# Altium PCB X-DO10 RFID_V1.0..PcbDoc (part 2 of 3)
Units mm, origin at the board's own origin, x right, y up, seen from the top; angles counter-clockwise.
Board outline 1582.55 x 1344.17 mm, 2 copper layers (Top Layer, Bottom Layer); 182 components, 148 nets, 511 pads, 172 vias.
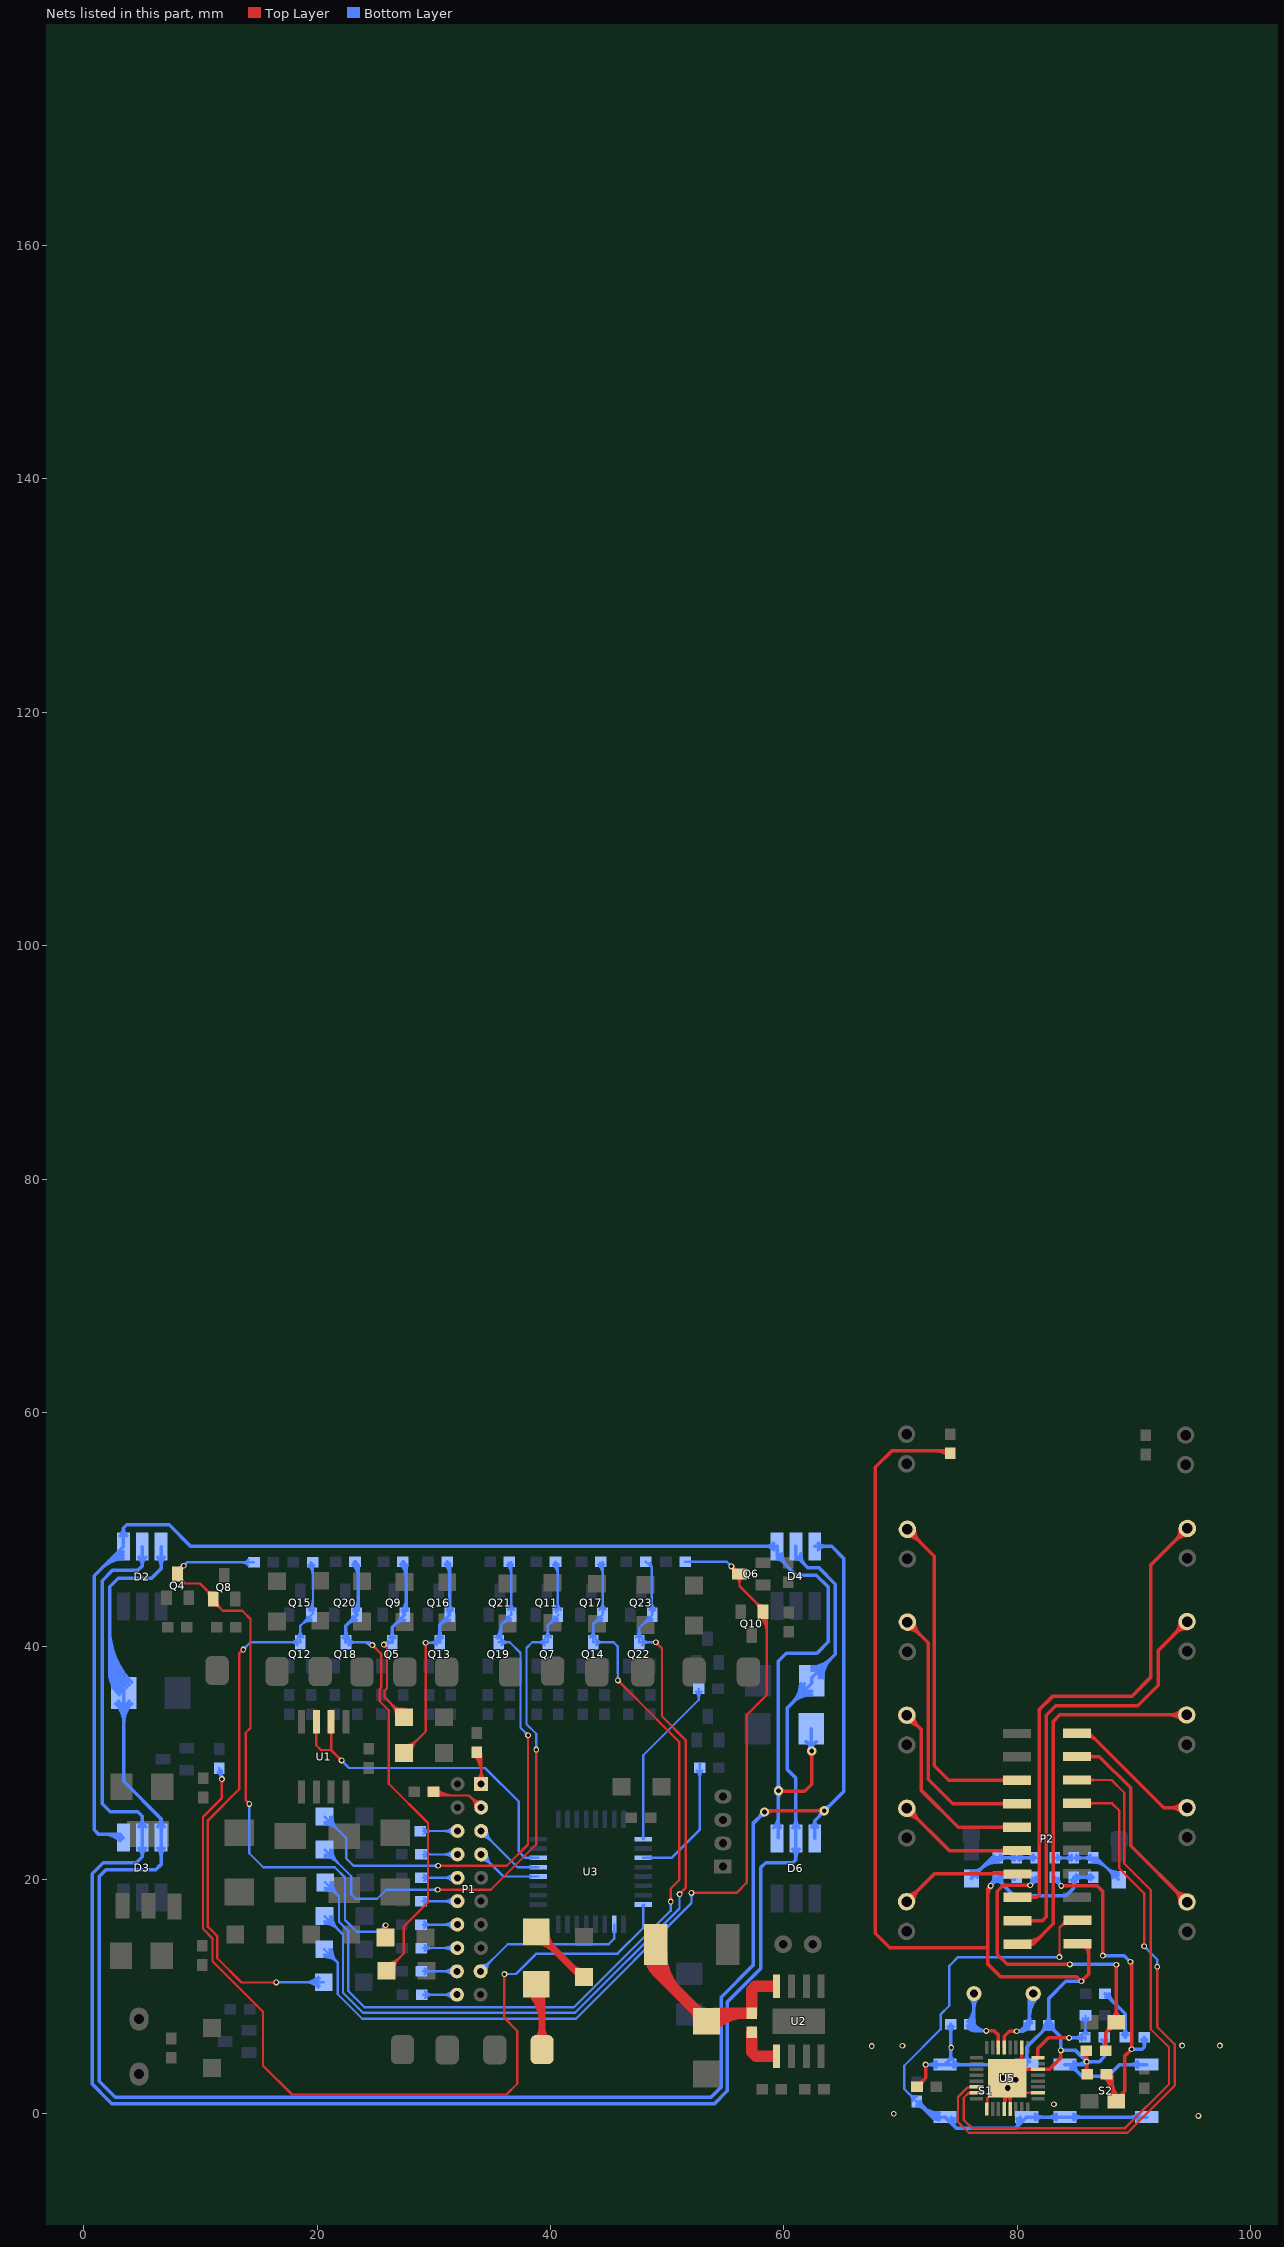
[diagram p2: the nets of this part, all layers, seen from the top]

## Via types
v1: diameter 0.5, hole 0.3, Top Layer to Bottom Layer, 158 vias
v2: diameter 0.8, hole 0.4, Top Layer to Bottom Layer, 14 vias

## Nets (pads, with @x,y where several pads share a name; then routed paths per layer and width w, separated by ;. In a path a pad name is that pad's centre, name@x,y a point inside that pad or via, vN(x,y) a via of type N, cw(c..) or ccw(c..) an arc to the next point about the centre after c; other vN are vias at no path point) (continued)
GND_R: C10.2 C11.2 C12.2 C13.2 C14.1 C15.1 C19.2 C20.1 C21.2 C22.1 P2.20 pad.0 R55.1 S1.1 S1.3 S2.1 S2.3 U5.1 U5.4 U5.5 U5.10 U5.14 U5.18 U5.33 | length 208
  Top Layer w0.2: U5.1@77.34,0.81 ccw(c77.194,0.956) 77.4,0.956 ; U5.1@77.375,0.375 77.4,0.4 77.4,1.275 ; U5.33@77.667,2.473 cw(c76.591,2.084) 77.4,1.275 ; U5.33@77.699,1.574 ccw(c76.248,3.025) U5.33@78.3,3.025 ; U5.33@77.855,2.541 cw(c76.918,2.203) 77.623,1.498 cw(c78.328,0.793) U5.33@78.666,1.73 ; U5.33@78.04,1.915 ccw(c76.931,3.025) U5.33@78.5,3.025 ; U5.33@78.043,2.609 cw(c77.245,2.321) 77.845,1.72 cw(c78.446,1.12) U5.33@78.734,1.918 ; U5.33@78.382,2.257 ccw(c77.614,3.025) pad.0@78.7,3.025 ; U5.33@78.417,2.742 cw(c77.312,1.637) U5.33@78.875,1.637 ; U5.33@78.559,2.884 cw(c77.795,2.12) U5.33@78.875,2.12 ; U5.33@78.598,1.542 ccw(c78.209,0.466) 77.4,1.275 ; U5.4@78.875,0.375 U5.33@78.875,2.75 ; U5.4@78.875,0.485 cw(c80.865,0.485) 79.458,1.892 ccw(c79.658,1.692) 79.375,1.692 ccw(c78.692,1.692) pad.0@79.175,2.175 ccw(c79.899,1.451) U5.33@78.875,1.451 ; U5.4@78.875,0.968 cw(c80.382,0.968) U5.33@79.316,2.034 ; U5.33@78.875,2.482 cw(c79.243,2.482) U5.33@78.983,2.742 ; U5.33@78.892,1.892 cw(c77.726,0.726) U5.5@79.375,0.726 ; U5.33@79.034,2.034 cw(c78.209,1.209) 79.375,1.209 ; U5.5@79.375,0.375 79.375,2.75 U5.33@79.125,3 U5.33@78.875,2.75 ; U5.5@79.375,0.763 cw(c81.962,0.763) U5.33@80.133,2.592 ; 79.375,1.245 cw(c81.48,1.245) U5.33@79.991,2.734 ; U5.33@79.375,1.728 cw(c80.997,1.728) pad.0@79.85,2.875 ; U5.33@79.375,2.211 cw(c80.514,2.211) U5.33@79.709,3.016 ; U5.33@79.375,2.658 ccw(c79.658,2.658) U5.33@79.458,2.458 ; U5.33@79.375,2.694 cw(c80.031,2.694) U5.33@79.567,3.158 ; U5.33@80.375,1.75 U5.10@81.75,1.75 ; 77.4,1.275 U5.33@78.875,2.75
  Top Layer w0.3: C12.2@71.4,2.275 72.15,3.025 v1@72.15,4.225 ; C12.2@71.45,2.575 ccw(c71.45,3.179) 71.877,2.752 ; C12.2@71.75,2.275 cw(c72.595,2.275) 71.997,2.872 ; v1@72.054,4.104 cw(c71.823,3.873) 72.15,3.873 ; 73.127,56.73 cw(c73.127,55.477) R55.1@74.013,56.363 ; R55.1@74.225,56.525 74.02,56.73 69.23,56.73 67.825,55.325 67.825,15.425 69.075,14.175 77.475,14.175 77.475,12.775 78.55,11.7 85.075,11.7 v1(85.475,11.3) 86.1,11.925 P2.20@86.1,14.602 ; 77.475,14.25 77.475,19.25 v1(77.7,19.475) ; 77.475,18.69 cw(c78.485,18.69) v1@77.771,19.404 ; U5.33@79.875,3.75 U5.14@81.75,3.75 82.725,3.75 83.725,4.75 v1(83.725,5.375) ; U5.33@80.375,4.25 U5.18@80.375,5.625 ; C15.1@85.688,5.138 cw(c85.115,4.565) v1@85.925,4.565 ; C14.1@85.713,3.537 ccw(c85.201,4.049) 85.925,4.049 ccw(c86.649,4.049) C14.1@86.137,3.537 ; P2.20@85.761,14.338 cw(c84.942,13.519) 86.1,13.519 ; v1@85.838,4.475 ccw(c85.522,4.658) 85.875,4.752 ; C15.1@85.9,5.35 85.925,5.325 v1(85.925,4.425) C14.1@85.925,3.375 ; 85.925,4.686 cw(c86.564,4.686) C15.1@86.112,5.138
  Bottom Layer w0.3: v1(72.125,4.175) S1.1@73.72,4.175 ; S1.1@73.048,3.928 ccw(c72.45,3.33) 72.45,4.175 ccw(c72.45,5.02) S1.1@73.048,4.422 ; S1.1@74.048,4.422 ccw(c73.498,4.972) 74.275,4.972 ; C11.2@74.063,7.413 cw(c73.551,6.901) 74.275,6.901 cw(c74.999,6.901) C11.2@74.487,7.413 ; 74.275,5.068 ccw(c75.188,5.068) 74.542,4.422 ccw(c75.14,5.02) 75.14,4.175 ccw(c75.14,3.33) S1.1@74.542,3.928 ; C11.2@74.275,7.625 74.275,4.655 S1.1@73.795,4.175 S1.3@80.795,4.175 80.795,5.67 C10.2@82.675,7.55 ; v1(77.7,19.475) 77.7,19.625 C22.1@78.3,20.225 ; v1@77.703,19.628 cw(c78.3,19.03) 78.3,19.875 cw(c78.3,19.513) C22.1@78.556,19.769 ; v1@77.797,19.449 cw(c78.461,19.271) C22.1@78.117,19.867 ; v1@77.8,19.475 cw(c78.404,19.475) C22.1@77.977,19.902 ; 77.823,19.748 ccw(c77.396,20.175) C22.1@78,20.175 ; C22.1@78.512,20.013 cw(c79.024,19.501) 79.024,20.225 cw(c79.024,20.949) C22.1@78.512,20.437 ; C22.1@78.6,20.175 ccw(c79.686,20.175) 78.918,19.407 ; C20.1@79.723,20.013 ccw(c79.211,19.501) 79.211,20.225 ccw(c79.211,20.949) C20.1@79.723,20.437 ; C20.1@79.935,20.225 C22.1@78.3,20.225 ; S1.3@80.048,3.928 ccw(c79.45,3.33) 79.45,4.175 ccw(c79.45,5.02) S1.3@80.048,4.422 ; S1.3@80.548,4.422 ccw(c79.95,5.02) 80.795,5.02 ccw(c81.64,5.02) S1.3@81.042,4.422 ; 82.078,6.953 ccw(c81.48,7.55) C10.2@82.325,7.55 ; 82.198,7.073 cw(c82.625,6.646) C10.2@82.625,7.25 ; C10.2@82.463,7.762 ccw(c81.951,8.274) 82.675,8.274 ccw(c83.399,8.274) C10.2@82.887,7.762 ; C10.2@82.725,7.25 cw(c82.725,6.646) 83.152,7.073 ; C10.2@83.025,7.55 ccw(c83.87,7.55) 83.272,6.953 ; S2.1@84.07,4.175 S2.1@84.525,4.175 ; S2.1@84.57,3.825 cw(c84.57,3.089) 85.091,3.609 ; C19.2@84.628,19.963 cw(c84.116,19.451) 84.84,19.451 cw(c85.564,19.451) C19.2@85.052,19.963 ; S2.1@84.817,3.928 cw(c85.415,3.33) 85.415,4.175 cw(c85.415,5.02) S2.1@84.817,4.422 ; S2.1@84.92,4.175 ccw(c85.874,4.175) 85.199,3.501 ; C19.2@85.052,20.013 cw(c85.564,19.501) 85.564,20.225 cw(c85.564,20.949) C19.2@85.052,20.437 ; 85.08,4.175 ccw(c85.08,5.27) v1@85.854,4.496 ; v1(85.475,11.3) 84.15,11.3 82.675,9.825 C10.2@82.675,7.55 ; 85.804,4.175 ccw(c85.804,4.546) v1@86.066,4.284 ; C21.2@86.263,20.013 ccw(c85.751,19.501) 85.751,20.225 ccw(c85.751,20.949) C21.2@86.263,20.437 ; C21.2@86.475,20.225 C19.2@84.84,20.225 84.84,19.315 84.175,18.65 79.675,18.65 78.3,20.025 C22.1@78.3,20.225 ; C13.2@87.213,6.288 cw(c86.701,5.776) 87.425,5.776 cw(c88.149,5.776) C13.2@87.637,6.288 ; C13.2@87.425,6.25 87.425,4.825 87.025,4.425 v1(85.925,4.425) ; S2.3@90.323,3.928 ccw(c89.725,3.33) 89.725,4.175 ccw(c89.725,5.02) S2.3@90.323,4.422 ; S2.3@91.07,4.175 88.775,4.175 87.775,3.175 85.525,3.175 S2.1@84.525,4.175 ; C10.2@82.675,7.55 83.725,6.5 v1(83.725,5.375) 84.975,5.375 v1(85.925,4.425) ; S2.1@84.525,4.175 85.675,4.175 v1(85.925,4.425)
  other v1: 95.5,-0.225 69.4,-0.05 83.125,0.775 74.325,5.625 67.525,5.75 70.15,5.775 94.1,5.8 97.35,5.8
KEY_OK: P1.9 U3.18 | length 17.2
  Bottom Layer w0.2: P1.9@34.012,12.159 36.329,14.475 44.975,14.475 45.45,14.95 U3.18@45.45,16.175 ; P1.9@34.012,12.459 ccw(c34.012,13.183) 34.524,12.671 ccw(c35.037,12.159) P1.9@34.312,12.159 ; P1.9@34.012,12.659 ccw(c34.012,13.866) 34.866,13.012 ccw(c35.719,12.159) P1.9@34.512,12.159 ; U3.18@45.379,15.554 cw(c45.209,15.384) 45.45,15.384 cw(c45.691,15.384) U3.18@45.521,15.554
KEY_OK_R: P2.19 R57.2 S1.2 S1.4 S2.2 S2.4 | length 67.3
  Top Layer w0.2: v1@83.494,13.481 ccw(c83.238,13.737) 83.6,13.737 ccw(c83.962,13.737) v1@83.706,13.481 ; v1(83.6,13.375) 83.6,15.925 ; 83.926,16.251 ccw(c83.656,16.521) P2.19@84.038,16.521 ; 83.933,16.258 cw(c84.326,15.865) P2.19@84.336,16.421 ; P2.19@84.333,16.221 ccw(c84.315,15.21) 83.6,15.925 ; P2.19@85.138,16.521 84.196,16.521 83.6,15.925
  Bottom Layer w0.2: 70.692,1.683 ccw(c71.375,2.366) R57.2@71.375,1.4 ; 70.813,1.562 cw(c70.301,1.05) R57.2@71.025,1.05 ; R57.2@71.375,1 70.3,2.075 70.3,4.075 73.419,7.194 73.419,8.469 74.15,9.2 74.15,12.625 74.9,13.375 v1(83.6,13.375)
  Bottom Layer w0.3: R57.2@71.375,0.65 cw(c71.375,-0.195) 71.972,0.403 ; R57.2@71.375,1 72.7,-0.325 ; R57.2@71.447,0.659 cw(c71.571,0.159) 71.837,0.6 ; R57.2@71.666,1.022 ccw(c72.572,1.246) 72.09,0.447 ; R57.2@71.675,0.95 ccw(c72.279,0.95) 71.852,0.523 ; R57.2@71.682,0.693 ccw(c73.295,2.306) S1.2@73.295,0.025 ; 72.194,0.181 ccw(c73.295,1.282) S1.2@73.295,-0.275 ; 72.706,-0.331 ccw(c73.295,0.258) S1.2@73.295,-0.575 ; S1.2@72.989,-0.495 ccw(c72.7,-0.656) 72.7,-0.325 ; S1.2@72.989,-0.155 cw(c72.7,0.006) 72.7,-0.325 ; S1.2@74.34,-0.347 ccw(c74.836,-0.587) 74.447,-0.977 ; S1.2@74.61,-0.477 ccw(c75.239,-0.781) 74.745,-1.275 ; S1.4@79.98,-0.477 cw(c79.351,-0.781) 79.845,-1.275 ; 80.143,-0.977 ccw(c79.754,-0.587) S1.4@80.25,-0.347 ; S1.4@81.542,-0.572 cw(c82.14,-1.17) 82.14,-0.325 cw(c82.14,0.52) S1.4@81.542,-0.078 ; S2.2@83.323,-0.572 ccw(c82.725,-1.17) 82.725,-0.325 ccw(c82.725,0.52) S2.2@83.323,-0.078 ; S2.2@84.817,-0.572 cw(c85.415,-1.17) 85.415,-0.325 cw(c85.415,0.52) S2.2@84.817,-0.078 ; 89.725,-0.325 cw(c89.725,-1.17) S2.4@90.323,-0.572 ; 89.725,-0.325 ccw(c89.725,0.52) S2.4@90.323,-0.078 ; S2.4@91.07,-0.325 S1.4@80.795,-0.325 79.845,-1.275 ; 72.7,-0.325 S1.2@73.795,-0.325 74.745,-1.275 ; 74.745,-1.275 79.845,-1.275
LDO1: D10.2 Q4.3 Q8.1 R23.2 | length 66
  Top Layer w0.2: Q4.3@8.05,45.656 cw(c8.05,44.827) 8.637,45.413 ; Q4.3@8.085,46.725 ccw(c8.145,47.33) v1(8.575,46.9) ; Q4.3@8.405,46.411 cw(c8.995,46.479) v1(8.575,46.9) ; Q4.3@8.407,46.014 ccw(c9.302,46.014) 8.669,45.381 ; v1@8.425,46.9 cw(c8.063,46.9) 8.319,46.644 cw(c8.575,46.388) v1@8.575,46.75 ; v1@8.427,46.924 cw(c8.174,46.964) 8.302,46.742 cw(c8.43,46.521) v1@8.521,46.76 ; v1@8.436,46.844 cw(c8.212,46.754) 8.421,46.633 cw(c8.63,46.513) v1@8.596,46.751 ; 10.477,44.873 cw(c9.841,44.237) Q8.1@10.74,44.237 ; 10.514,44.836 ccw(c11.097,45.42) Q8.1@11.097,44.594 ; Q8.1@11.097,43.524 cw(c11.097,42.672) 11.7,43.275 ; Q8.1@11.455,43.882 ccw(c12.327,43.882) 11.71,43.265 ; v1@14.05,26.5 ccw(c13.688,26.5) 13.944,26.756 ccw(c14.2,27.012) v1@14.2,26.65 ; v1(14.2,26.5) 13.9,26.8 13.9,32.6 14.3,33 14.3,42.35 13.6,43.05 11.925,43.05 11.097,43.878 Q8.1@11.097,44.059 11.097,44.253 9.975,45.375 8.675,45.375 8.05,46 Q4.3@8.05,46.191 8.05,46.375 v1(8.575,46.9) ; D10.2@25.588,15.648 ccw(c25.376,16.096) v1@25.871,16.096 ; v1@25.765,15.998 cw(c25.645,15.886) 25.803,15.844 cw(c25.956,15.803) v1@25.915,15.955 ; v1@25.769,15.994 cw(c25.523,15.748) D10.2@25.871,15.748 ; v1@25.836,15.955 cw(c25.801,15.82) 25.935,15.857 cw(c26.061,15.89) v1@25.975,15.988 ; D10.2@25.871,15.05 v1@25.871,16.096 ; D10.2@25.871,15.728 cw(c26.247,15.728) v1@25.981,15.994 ; v1(25.875,16.1) v1@25.871,16.096 ; D10.2@26.154,15.648 cw(c26.366,16.096) v1@25.871,16.096
  Bottom Layer w0.2: v1(8.575,46.9) 8.875,47.2 R23.2@14.6,47.2 ; v1@8.575,47.05 ccw(c8.575,47.412) 8.831,47.156 ccw(c9.087,46.9) v1@8.725,46.9 ; v1@14.094,26.394 cw(c13.838,26.138) 14.2,26.138 cw(c14.562,26.138) v1@14.306,26.394 ; R23.2@14.128,46.928 ccw(c13.53,46.33) 13.53,47.175 ccw(c13.53,48.02) R23.2@14.128,47.422 ; v1(14.2,26.5) 14.2,22.275 15.4,21.075 21.525,21.075 22.4,20.2 22.4,16.55 23.4,15.55 25.325,15.55 v1(25.875,16.1) ; v1@25.725,16.1 cw(c25.363,16.1) 25.619,15.844 cw(c25.875,15.588) v1@25.875,15.95
LDO2: D13.2 Q12.3 Q15.1 R36.2 | length 65.7
  Top Layer w0.2: v1@13.525,39.725 cw(c13.163,39.725) 13.419,39.469 cw(c13.675,39.213) v1@13.675,39.575 ; v1(13.675,39.725) 13.325,39.375 13.325,27.762 10.65,25.087 10.65,15.975 11.45,15.175 11.45,13.275 13.525,11.2 v1(16.5,11.2) ; v1@16.394,11.094 ccw(c16.138,10.838) 16.138,11.2 ccw(c16.138,11.562) v1@16.394,11.306
  Bottom Layer w0.2: v1(13.675,39.725) 14.291,40.341 Q12.3@18.575,40.341 18.575,41.757 Q15.1@19.528,42.709 19.65,42.832 19.65,47.025 R36.2@19.475,47.2 ; v1@13.675,39.875 ccw(c13.675,40.237) 13.931,39.981 ccw(c14.187,39.725) v1@13.825,39.725 ; v1(16.5,11.2) 16.525,11.225 D13.2@20.571,11.225 ; v1@16.606,11.094 cw(c16.922,10.778) 16.922,11.225 ; v1@16.606,11.306 ccw(c16.802,11.502) 16.802,11.225 ; Q12.3@18.322,40.089 ccw(c17.713,39.479) 17.713,40.341 ccw(c17.713,41.204) Q12.3@18.322,40.594 ; Q12.3@18.322,40.772 ccw(c17.713,41.382) 18.575,41.382 ccw(c19.437,41.382) Q12.3@18.828,40.772 ; 18.614,41.796 cw(c19.528,40.883) Q15.1@19.528,42.174 ; 18.956,42.138 cw(c19.528,41.566) Q15.1@19.528,42.374 ; 19.043,42.225 ccw(c18.737,42.532) Q15.1@19.17,42.532 ; Q15.1@19.275,43.14 ccw(c18.369,44.045) 19.65,44.045 ; R36.2@19.278,46.953 cw(c18.378,46.053) 19.65,46.053 ; Q15.1@19.416,42.998 ccw(c18.852,43.562) 19.65,43.562 ; R36.2@19.419,47.094 cw(c18.861,46.536) 19.65,46.536 ; 19.65,43.454 ccw(c20.094,43.454) Q15.1@19.78,43.14 ; 19.65,46.657 cw(c20.068,46.657) R36.2@19.772,46.953 ; D13.2@20.103,10.757 ccw(c18.973,9.627) 18.973,11.225 ccw(c18.973,12.823) D13.2@20.103,11.693 ; D13.2@20.244,10.898 ccw(c19.456,10.11) 19.456,11.225 ccw(c19.456,12.34) D13.2@20.244,11.552
LDO3: D14.2 Q18.3 Q20.1 R49.2 | length 53.9
  Top Layer w0.2: v1@24.75,39.95 cw(c24.75,39.588) 25.006,39.844 cw(c25.262,40.1) v1@24.9,40.1 ; v1(24.75,40.1) 25.5,39.35 25.5,36.475 25.375,36.35 25.375,35.3 26.15,34.525 26.15,28.225 29.5,24.875 29.5,18.075 27.425,16 27.425,13.679 D14.2@25.946,12.2 ; D14.2@25.946,12.662 ccw(c25.946,13.777) 26.735,12.989 ccw(c27.523,12.2) D14.2@26.408,12.2 ; D14.2@25.946,12.862 ccw(c25.946,14.46) 27.076,13.33 ccw(c28.206,12.2) D14.2@26.608,12.2
  Bottom Layer w0.2: Q18.3@22.475,40.341 24.509,40.341 v1(24.75,40.1) ; Q18.3@22.728,40.089 cw(c23.337,39.479) 23.337,40.341 cw(c23.337,41.204) Q18.3@22.728,40.594 ; 23.805,40.341 cw(c23.805,39.155) v1@24.644,39.994 ; 24.288,40.341 cw(c24.288,39.638) v1@24.785,40.135
  Bottom Layer w0.3: Q18.3@22.258,40.736 ccw(c21.733,41.261) 22.475,41.261 ccw(c23.217,41.261) Q18.3@22.692,40.736 ; Q18.3@22.475,40.341 22.475,41.757 Q20.1@23.427,42.709 ; 22.635,41.917 cw(c23.377,41.174) Q20.1@23.377,42.224 ; Q20.1@22.943,42.225 ccw(c22.637,42.532) Q20.1@23.07,42.532 ; R49.2@23.088,47.013 cw(c22.033,45.958) 23.525,45.958 ; Q20.1@23.16,43.104 ccw(c22.28,43.985) 23.525,43.985 ; R49.2@23.25,47.225 23.525,46.95 23.525,43.098 Q20.1@23.282,42.855 ; R49.2@23.3,47.225 cw(c22.757,46.682) 23.525,46.682
LDO4: D15.2 Q5.3 Q9.1 R24.2 | length 26.5
  Top Layer w0.2: v1@25.725,40 cw(c25.725,39.638) 25.981,39.894 cw(c26.237,40.15) v1@25.875,40.15 ; v1(25.725,40.15) 26,39.875 26,36.4 25.775,36.175 25.775,35.65 26.775,34.65 D15.2@27.446,34.65 ; 26.278,35.147 cw(c25.055,33.925) D15.2@26.784,33.925 ; 26.408,35.017 ccw(c27.446,36.055) D15.2@27.446,34.587 ; 26.619,34.806 cw(c25.738,33.925) D15.2@26.984,33.925 ; D15.2@26.75,34.675 ccw(c27.446,35.372) D15.2@27.446,34.387
  Bottom Layer w0.2: v1@25.686,40.182 cw(c26.025,39.902) Q5.3@26.025,40.341 ; v1(25.725,40.15) 25.916,40.341 Q5.3@26.45,40.341 ccw(c26.45,39.551) v1@25.841,40.054 ; Q5.3@26.12,40.205 ccw(c25.916,40.121) 25.916,40.341 ccw(c25.916,40.561) Q5.3@26.12,40.478
  Bottom Layer w0.3: Q5.3@26.233,40.736 ccw(c25.708,41.261) 26.45,41.261 ccw(c27.192,41.261) Q5.3@26.667,40.736 ; Q5.3@26.45,40.341 26.45,41.632 Q9.1@27.527,42.709 ; 26.7,41.881 cw(c27.527,41.054) Q9.1@27.527,42.224 ; R24.2@27.188,47.038 cw(c26.133,45.983) 27.625,45.983 ; Q9.1@27.31,43.104 ccw(c26.55,43.864) 27.625,43.864 ; R24.2@27.35,47.25 27.625,46.975 27.625,43.098 Q9.1@27.382,42.855 ; R24.2@27.4,47.25 cw(c26.857,46.707) 27.625,46.707 ; 27.625,43.393 ccw(c28.034,43.393) Q9.1@27.745,43.104
LDO5: D16.2 Q13.3 Q16.1 R37.2 | length 30.1
  Top Layer w0.2: D16.2@27.446,30.85 29.325,32.729 29.325,40.275 v1(29.3,40.3) ; D16.2@27.446,31.312 ccw(c27.446,32.427) 28.235,31.639 ccw(c29.023,30.85) D16.2@27.908,30.85 ; D16.2@27.446,31.512 ccw(c27.446,33.11) 28.576,31.98 ccw(c29.706,30.85) D16.2@28.108,30.85 ; v1@29.194,40.194 cw(c28.878,39.878) 29.325,39.878 ; 29.325,39.998 cw(c29.602,39.998) v1@29.406,40.194
  Bottom Layer w0.2: v1(29.3,40.3) 30.484,40.3 Q13.3@30.525,40.341 ; v1@29.406,40.194 cw(c29.662,39.938) 29.662,40.3 cw(c29.662,40.662) v1@29.406,40.406 ; 29.563,40.3 ccw(c29.563,41.304) Q13.3@30.272,40.594 ; 29.763,40.3 cw(c29.763,39.579) Q13.3@30.272,40.089 ; 30.046,40.3 ccw(c30.046,40.821) Q13.3@30.414,40.453
  Bottom Layer w0.3: Q13.3@30.308,40.736 ccw(c29.783,41.261) 30.525,41.261 ccw(c31.267,41.261) Q13.3@30.742,40.736 ; Q13.3@30.525,40.341 30.525,41.857 Q16.1@31.378,42.709 ; 30.55,41.881 cw(c31.378,41.054) Q16.1@31.378,42.224 ; R37.2@30.988,47.038 cw(c30.114,46.164) 31.35,46.164 ; R37.2@31.15,47.25 31.35,47.05 31.35,42.972 Q16.1@31.232,42.855 ; Q16.1@31.16,43.104 ccw(c30.702,43.562) 31.35,43.562 ; 31.35,43.695 ccw(c32.186,43.695) Q16.1@31.595,43.104
LDO6: D7.2 Q19.3 Q21.1 R50.2 | length 61.7
  Top Layer w0.2: v1(30.375,21.2) 36.25,21.2 38.075,23.025 38.075,32.013 ; v1@30.481,21.094 cw(c30.737,20.838) 30.737,21.2 cw(c30.737,21.562) v1@30.481,21.306 ; v1@37.969,32.269 cw(c37.713,32.013) 38.075,32.013 ; v1@38.181,32.269 ccw(c38.437,32.013) 38.075,32.013
  Bottom Layer w0.2: D7.2@20.646,24.763 cw(c20.646,23.165) 21.776,24.295 cw(c22.906,25.425) D7.2@21.308,25.425 ; D7.2@20.646,24.963 cw(c20.646,23.848) 21.435,24.636 cw(c22.223,25.425) D7.2@21.108,25.425 ; D7.2@20.646,25.425 22.5,23.571 22.5,21.825 23.125,21.2 v1(30.375,21.2) ; v1@30.269,21.094 ccw(c30.013,20.838) 30.013,21.2 ccw(c30.013,21.562) v1@30.269,21.306 ; Q19.3@35.323,40.773 ccw(c34.248,41.857) 35.775,41.857 ; Q19.3@35.464,40.631 ccw(c34.724,41.377) 35.775,41.377 ; Q19.3@35.574,40.341 Q19.3@35.775,40.341 ; Q19.3@35.828,40.089 cw(c36.437,39.479) 36.437,40.341 cw(c36.437,41.204) Q19.3@35.828,40.594 ; 36.091,42.173 cw(c36.58,41.684) Q21.1@36.619,42.375 ; 36.143,42.225 ccw(c35.837,42.532) Q21.1@36.27,42.532 ; R50.2@36.278,47.003 cw(c35.378,46.103) 36.65,46.103 ; Q21.1@36.375,43.14 ccw(c35.711,43.804) 36.65,43.804 ; R50.2@36.419,47.144 cw(c35.861,46.586) 36.65,46.586 ; Q21.1@36.608,42.175 ccw(c36.547,41.085) 35.775,41.857 ; Q21.1@36.628,42.709 35.775,41.857 ; Q21.1@36.65,42.837 R50.2@36.65,47.225 ; 36.65,43.695 ccw(c37.436,43.695) Q21.1@36.88,43.14 ; 36.65,46.707 cw(c37.068,46.707) R50.2@36.772,47.003 ; v1@37.925,32.375 ccw(c37.563,32.375) 37.819,32.631 ccw(c38.075,32.887) v1@38.075,32.525 ; v1(38.075,32.375) 37.425,33.025 37.425,39.425 36.509,40.341 Q19.3@35.775,40.341 ; Q19.3@35.775,40.341 35.775,41.857
LDO7: D8.2 Q7.3 Q11.1 R26.2 | length 63.6
  Top Layer w0.2: v1(30.325,19.15) 34.875,19.15 38.775,23.05 v1(38.775,31.15) ; v1@30.431,19.044 cw(c30.687,18.788) 30.687,19.15 cw(c30.687,19.512) v1@30.431,19.256 ; v1@38.669,31.044 cw(c38.413,30.788) 38.775,30.788 cw(c39.137,30.788) v1@38.881,31.044
  Bottom Layer w0.2: D8.2@20.646,21.938 cw(c20.646,20.34) 21.776,21.47 cw(c22.906,22.6) D8.2@21.308,22.6 ; D8.2@20.646,22.138 cw(c20.646,21.023) 21.435,21.811 cw(c22.223,22.6) D8.2@21.108,22.6 ; D8.2@20.646,22.6 22.938,20.308 22.938,18.762 23.325,18.375 25.15,18.375 25.925,19.15 v1(30.325,19.15) ; v1@30.219,19.044 ccw(c29.963,18.788) 29.963,19.15 ccw(c29.963,19.512) v1@30.219,19.256 ; v1@38.669,31.256 ccw(c38.413,31.512) 38.775,31.512 ccw(c39.137,31.512) v1@38.881,31.256 ; v1(38.775,31.15) 38.775,32.5 37.95,33.325 37.95,39.85 38.441,40.341 Q7.3@39.775,40.341 39.775,41.807 Q11.1@40.677,42.709 ; Q7.3@39.522,40.089 ccw(c38.913,39.479) 38.913,40.341 ccw(c38.913,41.204) Q7.3@39.522,40.594 ; Q7.3@39.522,40.772 ccw(c38.913,41.382) 39.775,41.382 ccw(c40.637,41.382) Q7.3@40.028,40.772 ; 39.8,41.831 cw(c40.628,41.003) Q11.1@40.628,42.174 ; 40.108,42.14 ccw(c39.716,42.532) Q11.1@40.27,42.532 ; 40.141,42.173 cw(c40.628,41.686) Q11.1@40.628,42.374 ; R26.2@40.228,47.003 cw(c39.268,46.043) 40.625,46.043 ; R26.2@40.369,47.144 cw(c39.751,46.526) 40.625,46.526 ; Q11.1@40.375,43.14 ccw(c39.771,43.744) 40.625,43.744 ; R26.2@40.425,47.25 40.625,47.05 40.625,43.048 Q11.1@40.482,42.905 ; 40.625,43.756 ccw(c41.496,43.756) Q11.1@40.88,43.14 ; 40.625,46.767 cw(c40.958,46.767) R26.2@40.722,47.003
LDO8: D9.2 Q14.3 Q17.1 R38.2 | length 90.5
  Top Layer w0.2: v1@45.775,36.925 cw(c45.775,36.563) 46.031,36.819 cw(c46.287,37.075) v1@45.925,37.075 ; v1(45.775,37.075) 49.15,33.7 49.15,33.684 51.025,31.809 51.025,19.975 50.3,19.25 v1(50.3,18.125) ; v1@50.194,18.231 ccw(c49.938,18.487) 50.3,18.487 ccw(c50.662,18.487) v1@50.406,18.231
  Bottom Layer w0.2: D9.2@20.696,19.113 cw(c20.696,17.515) 21.826,18.645 cw(c22.956,19.775) D9.2@21.358,19.775 ; D9.2@20.696,19.313 cw(c20.696,18.198) 21.485,18.986 cw(c22.273,19.775) D9.2@21.158,19.775 ; D9.2@20.696,19.775 21.875,18.596 21.875,16.4 22.675,15.6 22.675,10.475 24.075,9.075 42.019,9.075 50.3,17.356 v1(50.3,18.125) ; Q14.3@43.397,40.772 ccw(c42.788,41.382) 43.65,41.382 ccw(c44.512,41.382) Q14.3@43.903,40.772 ; Q14.3@43.903,40.089 cw(c44.512,39.479) 44.512,40.341 cw(c44.512,41.204) Q14.3@43.903,40.594 ; 43.946,42.202 cw(c44.371,41.777) Q17.1@44.436,42.375 ; 43.968,42.225 ccw(c43.662,42.532) Q17.1@44.095,42.532 ; R38.2@44.103,47.003 cw(c43.203,46.103) 44.475,46.103 ; Q17.1@44.2,43.14 ccw(c43.536,43.804) 44.475,43.804 ; R38.2@44.244,47.144 cw(c43.686,46.586) 44.475,46.586 ; Q17.1@44.414,42.176 ccw(c44.314,41.243) 43.65,41.907 ; Q17.1@44.453,42.709 43.65,41.907 ; Q17.1@44.475,42.837 R38.2@44.475,47.225 ; 44.475,43.695 ccw(c45.261,43.695) Q17.1@44.705,43.14 ; 44.475,46.707 cw(c44.893,46.707) R38.2@44.597,47.003 ; v1@45.669,37.181 ccw(c45.413,37.437) 45.775,37.437 ccw(c46.137,37.437) v1@45.881,37.181 ; 45.75,37.7 45.75,40 45.409,40.341 Q14.3@43.65,40.341 43.65,41.907 ; v1(45.775,37.075) 45.775,37.7 ; v1@50.194,18.019 cw(c49.938,17.763) 50.3,17.763 cw(c50.662,17.763) v1@50.406,18.019
LDO9: D11.2 Q22.3 Q23.1 R51.2 | length 87
  Top Layer w0.2: v1@49.025,40.191 cw(c49.025,39.829) 49.281,40.085 cw(c49.537,40.341) v1@49.175,40.341 ; v1(49.025,40.341) 49.55,39.816 49.55,34 51.575,31.975 51.575,19.3 v1(51.05,18.775) ; v1@51.05,18.925 ccw(c51.05,19.287) 51.306,19.031 ccw(c51.562,18.775) v1@51.2,18.775
  Bottom Layer w0.2: D11.2@20.646,16.238 cw(c20.646,14.64) 21.776,15.77 cw(c22.906,16.9) D11.2@21.308,16.9 ; D11.2@20.646,16.438 cw(c20.646,15.323) 21.435,16.111 cw(c22.223,16.9) D11.2@21.108,16.9 ; D11.2@20.646,16.9 22.225,15.321 22.225,10.325 23.95,8.6 42.109,8.6 51.05,17.541 v1(51.05,18.775) ; Q22.3@47.347,40.772 ccw(c46.738,41.382) 47.6,41.382 ccw(c48.462,41.382) Q22.3@47.853,40.772 ; 47.814,41.796 cw(c48.727,40.883) Q23.1@48.727,42.174 ; Q22.3@47.853,40.089 cw(c48.462,39.479) 48.462,40.341 cw(c48.462,41.204) Q22.3@47.853,40.594 ; R51.2@48.15,47.25 48.675,46.725 Q23.1@48.675,42.837 ; 48.156,42.138 cw(c48.727,41.566) Q23.1@48.727,42.374 ; 48.243,42.225 ccw(c47.937,42.532) Q23.1@48.37,42.532 ; Q23.1@48.475,43.14 ccw(c47.992,43.623) 48.675,43.623 ; R51.2@48.494,47.144 cw(c48.057,46.707) 48.675,46.707 ; 48.675,43.393 ccw(c49.234,43.393) Q23.1@48.839,42.998 ; 48.675,43.876 ccw(c49.717,43.876) Q23.1@48.98,43.14 ; Q23.1@48.727,42.709 47.6,41.582 Q22.3@47.6,40.341 v1(49.025,40.341) ; v1@48.919,40.235 ccw(c48.663,39.979) 48.663,40.341 ccw(c48.663,40.704) v1@48.919,40.447 ; v1@50.944,18.669 cw(c50.688,18.413) 51.05,18.413 cw(c51.412,18.413) v1@51.156,18.669
LDO10: D12.2 Q6.3 Q10.1 R25.2 | length 93.9
  Top Layer w0.2: v1(52.075,18.875) 55.925,18.875 56.8,19.75 56.8,34.1 58.525,35.825 58.525,42.643 Q10.1@58.203,42.966 58.203,43.147 56.184,45.166 Q6.3@56.184,46.2 56.15,46.2 v1(55.5,46.85) cw(c55.076,46.426) Q6.3@55.659,46.284 ; v1@52.181,18.769 cw(c52.437,18.513) 52.437,18.875 cw(c52.437,19.237) v1@52.181,18.981 ; v1@55.478,46.702 cw(c55.442,46.458) 55.655,46.581 cw(c55.868,46.704) v1@55.639,46.795 ; v1@55.5,46.7 cw(c55.5,46.338) 55.756,46.594 cw(c56.012,46.85) v1@55.65,46.85 ; v1@55.642,46.708 ccw(c56.006,47.071) Q6.3@56.006,46.557 ; v1@55.645,46.889 ccw(c56.166,47.029) Q6.3@55.896,46.561 ; Q6.3@55.752,46.598 cw(c55.481,46.328) Q6.3@55.853,46.237 ; Q6.3@55.931,45.947 cw(c55.321,45.338) 56.184,45.338 cw(c57.046,45.338) Q6.3@56.436,45.947 ; 57.59,43.76 cw(c56.973,43.143) Q10.1@57.845,43.143 ; 57.6,43.75 ccw(c58.203,44.353) Q10.1@58.203,43.501 ; Q10.1@57.95,42.535 cw(c56.562,41.147) 58.525,41.147 ; Q10.1@58.091,42.677 cw(c57.044,41.63) 58.525,41.63 ; Q10.1@58.233,42.818 cw(c57.527,42.113) 58.525,42.113
  Bottom Layer w0.2: D12.2@20.621,13.388 cw(c20.621,11.79) 21.751,12.92 cw(c22.881,14.05) D12.2@21.283,14.05 ; D12.2@20.621,13.588 cw(c20.621,12.473) 21.41,13.261 cw(c22.198,14.05) D12.2@21.083,14.05 ; D12.2@20.621,14.05 21.775,12.896 21.775,10.2 23.875,8.1 42.175,8.1 52.075,18 v1(52.075,18.875) ; R25.2@51.55,47.25 55.1,47.25 v1(55.5,46.85) ; v1@51.969,18.769 cw(c51.713,18.513) 52.075,18.513 cw(c52.437,18.513) v1@52.181,18.769 ; v1@52.05,18.875 v1@52.05,18.95 ; v1@55.35,46.85 ccw(c54.988,46.85) 55.244,47.106 ccw(c55.5,47.362) v1@55.5,47
LED1: P1.13 R12.2 | length 7.3
  Bottom Layer w0.2: R12.2@29.075,24.175 32.028,24.175 P1.13@32.038,24.185 ; R12.2@29.147,23.928 cw(c29.745,23.33) 29.745,24.175 cw(c29.745,25.02) R12.2@29.147,24.422 ; 30.807,24.175 ccw(c30.807,25.416) P1.13@31.684,24.538 ; 30.855,24.175 cw(c30.855,23.002) P1.13@31.684,23.831 ; 31.29,24.175 ccw(c31.29,24.933) P1.13@31.826,24.397 ; 31.337,24.175 cw(c31.337,23.485) P1.13@31.826,23.973
LED1_R: D17.2 P2.3 | length 32
  Top Layer w0.3: D17.2@70.575,49.42 cw(c70.575,47.971) 71.599,48.996 cw(c72.624,50.02) D17.2@71.175,50.02 ; D17.2@70.575,50.02 72.875,47.72 72.875,29.775 74.128,28.522 P2.3@79.962,28.522 ; P2.3@78.986,28.346 ccw(c78.559,27.919) 78.559,28.522 ccw(c78.559,29.126) P2.3@78.986,28.699
LED2: P1.14 R13.2 | length 7.3
  Bottom Layer w0.2: R13.2@29.075,22.171 32.031,22.171 P1.14@32.038,22.178 ; R13.2@29.197,21.928 cw(c29.786,21.339) 29.786,22.171 ; R13.2@29.197,22.422 ccw(c29.804,23.029) 29.804,22.171 ; 30.814,22.171 ccw(c30.814,23.402) P1.14@31.684,22.532 ; 30.847,22.171 cw(c30.847,20.988) P1.14@31.684,21.825 ; 31.297,22.171 ccw(c31.297,22.919) P1.14@31.826,22.39 ; 31.33,22.171 cw(c31.33,21.471) P1.14@31.826,21.966
LED2_R: D18.2 P2.4 | length 25.9
  Top Layer w0.3: D18.2@70.575,41.47 cw(c70.575,40.021) 71.599,41.046 cw(c72.624,42.07) D18.2@71.175,42.07 ; D18.2@70.575,42.07 72.35,40.295 72.35,28.625 74.459,26.516 P2.4@79.962,26.516 ; P2.4@78.986,26.339 ccw(c78.559,25.912) 78.559,26.516 ccw(c78.559,27.119) P2.4@78.986,26.693
LED3: P1.15 R14.2 | length 7.3
  Bottom Layer w0.2: R14.2@29.075,20.168 32.034,20.168 P1.15@32.038,20.172 ; R14.2@29.197,19.928 cw(c29.778,19.347) 29.778,20.168 ; R14.2@29.197,20.422 ccw(c29.812,21.037) 29.812,20.168 ; 30.821,20.168 ccw(c30.821,21.388) P1.15@31.684,20.525 ; 30.84,20.168 cw(c30.84,18.974) P1.15@31.684,19.818 ; 31.304,20.168 ccw(c31.304,20.905) P1.15@31.826,20.384 ; 31.323,20.168 cw(c31.323,19.457) P1.15@31.826,19.96
LED3_R: D19.2 P2.5 | length 19.7
  Top Layer w0.3: D19.2@70.525,33.495 cw(c70.525,32.046) 71.549,33.071 cw(c72.574,34.095) D19.2@71.125,34.095 ; D19.2@70.525,34.095 71.775,32.845 71.775,27.65 74.916,24.509 P2.5@79.962,24.509 ; P2.5@78.986,24.332 ccw(c78.559,23.906) 78.559,24.509 ccw(c78.559,25.113) P2.5@78.986,24.686
LED4: P1.16 R28.2 | length 7.3
  Bottom Layer w0.2: R28.2@29.05,18.164 P1.16@32.037,18.164 ; R28.2@29.197,17.928 cw(c29.769,17.356) 29.769,18.164 ; R28.2@29.197,18.422 ccw(c29.821,19.046) 29.821,18.164 ; 30.829,18.164 ccw(c30.829,19.374) P1.16@31.684,18.519 ; 30.833,18.164 cw(c30.833,16.96) P1.16@31.684,17.812 ; 31.311,18.164 ccw(c31.311,18.891) P1.16@31.826,18.377 ; 31.315,18.164 cw(c31.315,17.443) P1.16@31.826,17.953
LED4_R: D20.2 P2.6 | length 14.2
  Top Layer w0.3: D20.2@70.525,25.52 cw(c70.525,24.071) 71.549,25.096 cw(c72.574,26.12) D20.2@71.125,26.12 ; D20.2@70.525,26.12 74.142,22.503 P2.6@79.962,22.503 ; P2.6@78.986,22.326 ccw(c78.559,21.899) 78.559,22.503 ccw(c78.559,23.106) P2.6@78.986,22.679
LED5: P1.17 R29.2 | length 7.3
  Bottom Layer w0.2: R29.2@29.075,16.161 32.01,16.161 P1.17@32.012,16.159 ; R29.2@29.197,15.903 cw(c29.821,15.279) 29.821,16.161 ; R29.2@29.197,16.397 ccw(c29.769,16.969) 29.769,16.161 ; 30.8,16.161 cw(c30.8,14.946) P1.17@31.659,15.805 ; 30.811,16.161 ccw(c30.811,17.36) P1.17@31.659,16.512 ; 31.283,16.161 cw(c31.283,15.429) P1.17@31.8,15.946 ; 31.293,16.161 ccw(c31.293,16.877) P1.17@31.8,16.371
LED5_R: D21.2 P2.7 | length 13.7
  Top Layer w0.3: D21.2@70.5,18.12 72.876,20.496 P2.7@79.988,20.496 ; D21.2@70.5,18.72 ccw(c70.5,20.169) 71.524,19.144 ccw(c72.549,18.12) D21.2@71.1,18.12 ; P2.7@79.011,20.319 ccw(c78.584,19.892) 78.584,20.496 ccw(c78.584,21.1) P2.7@79.011,20.673
LED6: P1.18 R27.2 | length 7.3
  Bottom Layer w0.2: R27.2@29.075,14.157 32.007,14.157 P1.18@32.012,14.152 ; R27.2@29.222,13.903 cw(c29.837,13.288) 29.837,14.157 ; R27.2@29.222,14.397 ccw(c29.803,14.978) 29.803,14.157 ; 30.793,14.157 cw(c30.793,12.932) P1.18@31.659,13.798 ; 30.818,14.157 ccw(c30.818,15.346) P1.18@31.659,14.505 ; 31.275,14.157 cw(c31.275,13.415) P1.18@31.8,13.94 ; 31.301,14.157 ccw(c31.301,14.864) P1.18@31.8,14.364
LED6_R: D22.2 P2.8 | length 45.8
  Top Layer w0.3: P2.8@79.988,18.489 81.664,18.489 81.85,18.675 81.85,34.55 83,35.7 89.775,35.7 91.4,37.325 91.4,46.945 D22.2@94.55,50.095 ; P2.8@80.964,18.313 cw(c81.391,17.886) 81.391,18.489 cw(c81.391,19.093) P2.8@80.964,18.666 ; D22.2@93.95,50.095 cw(c92.501,50.095) 93.526,49.071 cw(c94.55,48.046) D22.2@94.55,49.495
LED7: P1.19 R39.2 | length 7.3
  Bottom Layer w0.2: R39.2@29.075,12.154 31.982,12.154 P1.19@31.987,12.159 ; R39.2@29.222,11.903 cw(c29.829,11.296) 29.829,12.154 ; R39.2@29.222,12.397 ccw(c29.811,12.986) 29.811,12.154 ; 30.768,12.154 ccw(c30.768,13.378) P1.19@31.634,12.512 ; 30.792,12.154 cw(c30.792,10.963) P1.19@31.634,11.805 ; 31.251,12.154 ccw(c31.251,12.895) P1.19@31.775,12.371 ; 31.275,12.154 cw(c31.275,11.446) P1.19@31.775,11.946
LED7_R: D23.2 P2.9 | length 40.2
  Top Layer w0.3: P2.9@80.013,16.496 82.146,16.496 82.475,16.825 82.475,34.1 83.275,34.9 90.3,34.9 92.05,36.65 92.05,39.645 D23.2@94.525,42.12 ; P2.9@80.989,16.319 cw(c81.416,15.892) 81.416,16.496 cw(c81.416,17.1) P2.9@80.989,16.673 ; D23.2@93.925,42.12 cw(c92.476,42.12) 93.501,41.096 cw(c94.525,40.071) D23.2@94.525,41.52
LED8: P1.20 R40.2 | length 7.3
  Bottom Layer w0.2: R40.2@29.075,10.15 31.985,10.15 P1.20@31.987,10.152 ; R40.2@29.272,9.903 cw(c29.87,9.305) 29.87,10.15 cw(c29.87,10.995) R40.2@29.272,10.397 ; 30.776,10.15 ccw(c30.776,11.364) P1.20@31.634,10.505 ; 30.785,10.15 cw(c30.785,8.949) P1.20@31.634,9.798 ; 31.258,10.15 ccw(c31.258,10.881) P1.20@31.775,10.364 ; 31.268,10.15 cw(c31.268,9.432) P1.20@31.775,9.94
LED8_R: D24.2 P2.10 | length 38.2
  Top Layer w0.3: P2.10@80.013,14.489 81.339,14.489 ; P2.10@80.813,14.439 ccw(c80.813,15.59) 81.626,14.776 ; P2.10@80.813,14.739 ccw(c80.813,16.615) 82.139,15.289 ; P2.10@81.006,14.331 cw(c81.339,14.06) 81.339,14.489 ; P2.10@81.006,14.647 ccw(c81.339,14.919) 81.339,14.489 ; D24.2@94.076,33.696 ccw(c93.051,32.671) 93.051,34.12 ccw(c93.051,35.569) D24.2@94.076,34.544 ; D24.2@94.5,34.12 83.62,34.12 83.063,33.563 83.063,17.575 83.075,17.563 83.075,16.225 81.339,14.489
LED9: P1.1 R41.2 | length 10.4
  Top Layer w0.2: R41.2@33.453,30.628 cw(c31.979,29.154) 34.063,29.154 ; R41.2@33.594,30.769 cw(c32.462,29.637) 34.063,29.637 ; R41.2@33.7,31.175 34.063,30.812 P1.1@34.063,28.198 ; P1.1@33.709,28.552 ccw(c32.856,29.405) 34.063,29.405 ccw(c35.27,29.405) P1.1@34.416,28.552 ; R41.2@33.735,30.91 cw(c32.945,30.12) 34.063,30.12 ; P1.1@33.851,28.41 ccw(c33.338,28.922) 34.063,28.922 ccw(c34.787,28.922) P1.1@34.275,28.41 ; R41.2@33.877,31.052 cw(c33.428,30.603) R41.2@34.063,30.603
LED9_R: D26.2 P2.11 | length 15.3
  Top Layer w0.3: P2.11@85.087,32.561 86.139,32.561 92.53,26.17 D26.2@94.525,26.17 ; P2.11@85.887,32.311 cw(c85.887,31.098) 86.744,31.956 ; D26.2@94.101,25.746 ccw(c93.076,24.721) 93.076,26.17 ccw(c93.076,27.619) D26.2@94.101,26.594
LED10: P1.2 R48.2 | length 11.2
  Top Layer w0.2: R48.2@29.975,27.55 30.075,27.55 30.4,27.225 33.029,27.225 P1.2@34.063,26.192 ; R48.2@29.99,27.515 ccw(c30.689,28.214) 30.689,27.225 ; R48.2@30.131,27.656 ccw(c31.172,28.697) 31.172,27.225 ; R48.2@30.272,27.797 ccw(c31.655,29.18) 31.655,27.225 ; P1.2@33.563,26.192 ccw(c32.356,26.192) 33.209,27.045 ccw(c34.063,27.899) P1.2@34.063,26.692 ; P1.2@33.763,26.192 ccw(c33.038,26.192) 33.551,26.704 ccw(c34.063,27.216) P1.2@34.063,26.492
LED10_R: D27.2 P2.12 | length 20.7
  Top Layer w0.3: P2.12@85.087,30.554 87.021,30.554 89.7,27.875 89.7,22.92 D27.2@94.525,18.095 ; P2.12@86.064,30.377 cw(c86.491,29.95) 86.491,30.554 cw(c86.491,31.158) P2.12@86.064,30.731 ; D27.2@93.925,18.095 ccw(c92.476,18.095) 93.501,19.119 ccw(c94.525,20.144) D27.2@94.525,18.695
LED_BLUE: R10.1 U3.11 | length 13.2
  Bottom Layer w0.2: U3.11@47.95,21.875 50.375,21.875 52.775,24.275 R10.1@52.775,29.925 ; U3.11@48.571,21.804 cw(c48.741,21.634) 48.741,21.875 cw(c48.741,22.116) U3.11@48.571,21.946 ; R10.1@52.528,29.328 cw(c51.93,28.73) 52.775,28.73 cw(c53.62,28.73) R10.1@53.022,29.328
LED_GREEN: R4.1 U3.9 | length 16.6
  Bottom Layer w0.2: U3.9@47.879,23.546 ccw(c47.709,23.716) 47.95,23.716 ccw(c48.191,23.716) U3.9@48.021,23.546 ; U3.9@47.95,23.475 47.95,30.675 52.7,35.425 R4.1@52.7,36.375 ; R4.1@52.453,36.128 cw(c51.855,35.53) 52.7,35.53 cw(c53.545,35.53) R4.1@52.947,36.128
LED_RED: R2.1 U3.16 | length 81.3
  Top Layer w0.2: v1@11.744,28.519 cw(c11.488,28.263) 11.85,28.263 cw(c12.212,28.263) v1@11.956,28.519 ; v1(11.85,28.625) 11.85,27 10.225,25.375 10.225,15.8 11.05,14.975 11.05,13.025 15.375,8.7 15.375,4.075 17.85,1.6 36.225,1.6 37.15,2.525 37.15,7.05 36.05,8.15 v1@36.05,11.9 ; v1@35.944,11.819 cw(c35.688,11.563) 36.05,11.563 cw(c36.412,11.563) v1@36.156,11.819
  Bottom Layer w0.2: R2.1@11.477,29.183 cw(c11.203,28.597) v1@11.85,28.597 ; R2.1@11.561,29.364 cw(c11.35,28.911) 11.85,28.911 ; R2.1@11.625,29.55 11.85,29.325 v1(11.85,28.625) ; v1@11.724,28.707 ccw(c11.489,28.86) 11.76,28.932 ccw(c12.006,28.998) v1@11.908,28.763 ; v1@11.744,28.731 ccw(c11.488,28.987) 11.85,28.987 ccw(c12.212,28.987) v1@11.956,28.731 ; v1(36.05,11.925) 37.05,11.925 38.8,13.675 45.75,13.675 47.95,15.875 U3.16@47.95,17.875 ; v1@36.156,11.819 cw(c36.412,11.563) 36.412,11.925 cw(c36.412,12.287) v1@36.156,12.031 ; U3.16@47.879,17.804 cw(c47.709,17.634) 47.95,17.634 cw(c48.191,17.634) U3.16@48.021,17.804
M485_CTRL: U1.2 U1.3 U3.30 | length 33
  Top Layer w0.2: U1.3@19.794,32.684 cw(c19.452,32.342) 19.935,32.342 cw(c20.418,32.342) U1.3@20.076,32.684 ; U1.3@19.935,33.525 19.935,31.515 20.33,31.12 21.205,31.12 ; U1.2@21.064,32.684 cw(c20.722,32.342) 21.205,32.342 cw(c21.688,32.342) U1.2@21.346,32.684 ; U1.2@21.205,33.525 21.205,31.12 ; v1@21.95,30.225 ccw(c21.588,30.225) 21.844,30.481 ccw(c22.1,30.737) v1@22.1,30.375 ; v1(22.1,30.225) 21.205,31.12
  Bottom Layer w0.2: v1@22.1,30.075 cw(c22.1,29.713) 22.356,29.969 cw(c22.612,30.225) v1@22.25,30.225 ; v1(22.1,30.225) 22.75,29.575 34.4,29.575 37.275,26.7 37.275,22.425 37.825,21.875 U3.30@38.95,21.875 ; U3.30@38.329,21.804 ccw(c38.159,21.634) 38.159,21.875 ccw(c38.159,22.116) U3.30@38.329,21.946
MISI: P1.4 U3.28 | length 9.1
  Bottom Layer w0.2: P1.4@34.063,21.678 cw(c34.063,20.471) 34.916,21.325 cw(c35.77,22.178) P1.4@34.563,22.178 ; P1.4@34.063,21.878 cw(c34.063,21.154) 34.575,21.666 cw(c35.087,22.178) P1.4@34.363,22.178 ; P1.4@34.063,22.178 35.966,20.275 U3.28@38.95,20.275 ; U3.28@38.329,20.204 ccw(c38.159,20.034) 38.159,20.275 ccw(c38.159,20.516) U3.28@38.329,20.346
MISI_R: P2.14 U5.30 | length 57.8
  Top Layer w0.2: 75.809,2.2 ccw(c75.809,2.491) U5.30@76.015,2.285 ; U5.30@76.5,2.25 76.45,2.2 75.71,2.2 74.9,1.39 74.9,-0.75 75.825,-1.675 89.425,-1.675 93.475,2.375 93.475,5.9 91.975,7.4 v1(91.975,12.55) ; P2.14@85.087,26.541 88.109,26.541 88.725,25.925 88.725,20.975 90.85,18.85 v1(90.85,14.3) ; P2.14@86.099,26.329 cw(c86.612,25.817) 86.612,26.541 cw(c86.612,27.265) P2.14@86.099,26.753 ; v1@90.744,14.406 ccw(c90.488,14.662) 90.85,14.662 ccw(c91.212,14.662) v1@90.956,14.406 ; v1@91.869,12.444 cw(c91.613,12.188) 91.975,12.188 cw(c92.337,12.188) v1@92.081,12.444
  Bottom Layer w0.2: v1@90.85,14.15 cw(c90.85,13.788) 91.106,14.044 cw(c91.362,14.3) v1@91,14.3 ; v1(90.85,14.3) 91.975,13.175 v1(91.975,12.55) ; v1@91.869,12.656 ccw(c91.613,12.912) 91.975,12.912 ccw(c92.337,12.912) v1@92.081,12.656
MISO: P1.3 U3.29 | length 9.6
  Bottom Layer w0.2: P1.3@34.063,23.685 cw(c34.063,22.478) 34.916,23.331 cw(c35.77,24.185) P1.3@34.563,24.185 ; P1.3@34.063,23.885 cw(c34.063,23.161) 34.575,23.673 cw(c35.087,24.185) P1.3@34.363,24.185 ; P1.3@34.063,24.185 37.173,21.075 U3.29@38.95,21.075 ; U3.29@38.329,21.004 ccw(c38.159,20.834) 38.159,21.075 ccw(c38.159,21.316) U3.29@38.329,21.146
MISO_R: P2.13 U5.31 | length 55
  Top Layer w0.2: 75.809,1.7 ccw(c75.809,1.991) U5.31@76.015,1.785 ; U5.31@76.5,1.75 76.45,1.7 75.776,1.7 75.4,1.324 75.4,-0.575 76.1,-1.275 89.225,-1.275 92.975,2.475 92.975,5.65 91.425,7.2 91.425,19.125 89.15,21.4 89.15,27.45 88.053,28.547 P2.13@85.087,28.547 ; P2.13@86.099,28.335 cw(c86.612,27.823) 86.612,28.547 cw(c86.612,29.272) P2.13@86.099,28.76
Net24V_1: 24V.1 D1.1 | length 13.7
  Top Layer w0.6: D1.1@38.174,10.449 cw(c35.516,7.791) 39.275,7.791 ; D1.1@38.45,11.05 39.025,11.05 39.275,10.8 24V.1@39.275,5.475 ; D1.1@38.598,10.873 cw(c36.964,9.239) 39.275,9.239 ; 24V.1@38.78,6.195 ccw(c37.585,7.39) 39.275,7.39 ccw(c40.965,7.39) 24V.1@39.77,6.195
NetC4_1: C4.1 U2.1 | length 3.8
  Top Layer w1: C4.1@57.225,6.925 57.225,5.25 57.6,4.875 U2.1@59.175,4.875
NetC4_2: C4.2 D5.2 L1.1 U2.8 | length 29.6
  Top Layer w1: L1.1@48.503,13.717 ccw(c50.843,13.717) 49.188,12.062 ; L1.1@48.649,13.363 cw(c47.795,12.51) 49.003,12.51 cw(c50.21,12.51) L1.1@49.356,13.363 ; L1.1@49.003,14.467 49.003,12.247 D5.2@53.375,7.875 54.075,8.575 C4.2@57.225,8.575 57.225,10.55 57.55,10.875 U2.8@59.15,10.875 ; L1.1@49.503,13.717 ccw(c54.258,13.717) 50.895,10.355 ; D5.2@52.725,7.875 ccw(c51.156,7.875) 52.265,8.985 ccw(c53.375,10.094) D5.2@53.375,8.525 ; D5.2@53.835,7.415 cw(c56.634,4.616) 56.634,8.575
NetC10_1: C10.1 U5.21 X1.2 | length 13.6
  Top Layer w0.3: U5.21@78.875,5.625 78.875,6.6 79.3,7.025 v1(79.925,7.025)
  Bottom Layer w0.3: 80.307,7.025 ccw(c80.307,7.713) C10.1@80.975,7.55 ; 80.548,7.073 cw(c80.975,6.646) C10.1@80.975,7.25 ; C10.1@80.677,7.52 cw(c80.067,7.459) 80.5,7.025 ; C10.1@80.684,7.621 cw(c79.925,7.806) v1(79.925,7.025) 80.5,7.025 ; C10.1@80.813,7.762 ccw(c80.301,8.274) 81.025,8.274 ccw(c81.749,8.274) C10.1@81.237,7.762 ; 81.025,8.246 cw(c83.359,8.246) X1.2@81.709,9.896 ; 81.025,8.97 cw(c82.635,8.97) X1.2@81.496,10.109 ; X1.2@81.355,10.25 81.025,9.92 C10.1@81.025,7.55 80.5,7.025
NetC11_1: C11.1 U5.22 X1.1 | length 15.2
  Top Layer w0.3: v1(77.325,7.05) 78.025,7.05 78.375,6.7 U5.22@78.375,5.625
  Bottom Layer w0.3: C11.1@75.701,7.503 ccw(c76.399,7.815) 76.399,7.05 ; C11.1@75.763,7.837 ccw(c74.526,9.074) 76.275,9.074 ; X1.1@75.921,9.896 cw(c75.068,9.043) 76.275,9.043 cw(c77.482,9.043) X1.1@76.629,9.896 ; C11.1@75.975,7.325 cw(c75.975,6.721) 76.402,7.148 ; C11.1@76.249,7.747 ccw(c77.325,8.229) v1(77.325,7.05) 76.5,7.05 ; C11.1@76.275,7.616 ccw(c77.044,7.594) 76.5,7.05 ; 76.275,8.349 cw(c75.251,8.349) 75.975,7.625 ccw(c76.862,8.022) 76.862,7.05 ; X1.1@76.275,10.25 76.275,7.975 C11.1@75.925,7.625 76.5,7.05
NetC13_1: C13.1 R61.1 U5.16 | length 11.1
  Top Layer w0.3: U5.16@81.75,4.75 81.75,5.55 82.663,6.463 v1@84.413,6.463 ; 84.153,6.463 cw(c84.153,6.178) v1@84.354,6.379
  Bottom Layer w0.2: C13.1@85.578,6.747 ccw(c84.98,7.345) 85.825,7.345 ccw(c86.67,7.345) C13.1@86.072,6.747 ; R61.1@85.578,8.128 cw(c84.98,7.53) 85.825,7.53 cw(c86.67,7.53) R61.1@86.072,8.128 ; C13.1@85.825,6.3 R61.1@85.825,8.375
  Bottom Layer w0.3: v1(84.425,6.45) C13.1@85.575,6.45 ; 84.88,6.45 ccw(c84.88,7.345) C13.1@85.513,6.712 ; 85.121,6.45 cw(c85.121,5.896) C13.1@85.513,6.288
NetC14_2: C14.2 C16.2 C18.2 L2.2 | length 41
  Top Layer w0.3: v1(83.75,19.475) 86.825,19.475 87.325,18.975 v1(87.325,13.5) ; C14.2@87.463,3.113 cw(c85.881,1.531) L2.2@88.118,1.531 ; C14.2@87.625,3.325 88.118,2.832 ; C14.2@87.675,3.025 cw(c87.675,2.421) 88.102,2.848 ; C14.2@87.675,3.325 cw(c86.606,2.256) 88.118,2.256 ; C14.2@87.887,3.537 cw(c87.33,2.98) C14.2@88.118,2.98 ; C14.2@87.972,3.279 ccw(c88.486,3.2) 88.118,2.832 ; L2.2@87.998,1.368 ccw(c87.708,1.658) L2.2@88.118,1.658 ; L2.2@88.118,1.025 88.118,2.832 ; 88.118,2.01 ccw(c89.326,2.01) L2.2@88.472,1.156 ; 88.118,2.734 ccw(c90.05,2.734) L2.2@88.684,1.368 ; L2.2@88.193,1.15 88.45,1.15 89.175,1.875 ; L2.2@88.595,1.51 ccw(c88.595,2.029) 88.962,1.662 ; L2.2@89.043,1.211 cw(c89.606,1.444) 89.175,1.875 ; v1@89.604,12.904 cw(c89.192,12.492) 89.775,12.492 ; v1@89.775,12.975 v1(89.775,5.475) 89.175,4.875 89.175,1.875
  Bottom Layer w0.3: C16.2@83.205,19.875 cw(c83.205,19.525) C16.2@83.453,19.772 ; C16.2@83.205,20.225 83.205,20.02 v1(83.75,19.475) cw(c84.352,20.077) C16.2@83.504,20.149 ; v1(87.325,13.5) 89.15,13.5 v1(89.675,12.975) ; v1(89.775,5.475) 90.7,5.475 90.875,5.65 C18.2@90.875,6.525 ; C18.2@90.663,6.313 cw(c90.151,5.801) 90.875,5.801 cw(c91.599,5.801) C18.2@91.087,6.313
NetC15_2: C15.2 C17.2 L3.2 | length 34.2
  Top Layer w0.3: v1(81.075,19.525) 78.775,19.525 78.275,19.025 78.275,13.6 79.125,12.75 83.651,12.75 ; 83.652,12.751 v1@84.499,12.751 ; C15.2@87.338,5.562 ccw(c86.826,6.074) 87.55,6.074 ccw(c88.274,6.074) C15.2@87.762,5.562 ; C15.2@87.55,5.35 87.55,6.882 ; 87.73,7.062 cw(c88.341,6.451) L3.2@88.341,7.315 ; L3.2@87.859,7.75 cw(c86.792,7.64) 87.55,6.882 ; L3.2@88.125,8.143 ccw(c87.297,8.971) 88.468,8.971 ccw(c89.639,8.971) L3.2@88.811,8.143 ; 88.468,12.467 cw(c88.733,12.467) v1@88.546,12.654 ; v1@88.468,12.725 L3.2@88.468,7.8 87.55,6.882
  Bottom Layer w0.3: v1@81.167,19.486 cw(c81.821,19.212) C17.2@81.553,19.868 ; C17.2@81.273,20.13 cw(c80.577,20.023) v1(81.075,19.525) 81.57,20.02 C17.2@81.57,20.225 ; C17.2@81.322,19.772 cw(c81.57,19.525) C17.2@81.57,19.875 ; v1(84.5,12.751) 88.45,12.75 v1(88.475,12.725) ; 88.173,12.75 cw(c88.173,12.423) v1@88.404,12.654
NetC16_1: C16.1 C19.1 C21.1 R59.1 | length 16
  Bottom Layer w0.254: C16.1@83.205,21.875 C21.1@86.475,21.875 86.807,21.875 R59.1@88.675,20.007 ; C16.1@83.433,21.647 cw(c83.985,21.095) 83.985,21.875 cw(c83.985,22.655) C16.1@83.433,22.103 ; C19.1@84.612,21.647 ccw(c84.06,21.095) 84.06,21.875 ccw(c84.06,22.655) C19.1@84.612,22.103 ; C19.1@85.068,21.647 cw(c85.62,21.095) 85.62,21.875 cw(c85.62,22.655) C19.1@85.068,22.103 ; C21.1@86.247,21.647 ccw(c85.695,21.095) 85.695,21.875 ccw(c85.695,22.655) C21.1@86.247,22.103 ; C21.1@86.475,21.502 cw(c86.475,19.8) 87.679,21.003 ; C21.1@86.475,21.756 cw(c86.475,20.667) 87.245,21.437 ; 87.591,21.091 ccw(c88.675,22.175) R59.1@88.675,20.642 ; 87.898,20.784 cw(c87.247,20.134) R59.1@88.167,20.134 ; 88.025,20.657 ccw(c88.675,21.308) R59.1@88.675,20.388
NetC17_1: C17.1 C20.2 C22.2 R60.1 | length 16.3
  Bottom Layer w0.3: R60.1@76.05,20.107 77.818,21.875 ; R60.1@76.05,20.419 ccw(c76.05,21.172) R60.1@76.583,20.64 ; R60.1@76.05,20.719 ccw(c76.05,22.197) 77.095,21.152 ; R60.1@76.535,20.234 cw(c77.399,20.234) 76.788,20.845 ; 76.88,20.937 cw(c78.3,19.516) C22.2@78.3,21.525 ; 77.392,21.449 cw(c78.3,20.541) C22.2@78.3,21.825 ; C22.2@78.031,21.743 ccw(c77.818,21.638) 77.818,21.875 ; C22.2@78.031,22.007 cw(c77.818,22.112) 77.818,21.875 ; C22.2@78.512,21.663 cw(c79.024,21.151) 79.024,21.875 cw(c79.024,22.599) C22.2@78.512,22.087 ; C20.2@79.723,21.663 ccw(c79.211,21.151) 79.211,21.875 ccw(c79.211,22.599) C20.2@79.723,22.087 ; C20.2@80.147,21.663 cw(c80.659,21.151) 80.659,21.875 cw(c80.659,22.599) C20.2@80.147,22.087 ; C17.1@81.358,21.663 ccw(c80.846,21.151) 80.846,21.875 ccw(c80.846,22.599) C17.1@81.358,22.087 ; C17.1@81.57,21.875 C20.2@79.935,21.875 C22.2@78.3,21.875 77.818,21.875
NetC18_1: C18.1 R53.2 | length 6.7
  Bottom Layer w0.3: R53.2@87.5,10.25 89.225,8.525 C18.1@89.225,6.525 ; R53.2@87.55,9.95 cw(c87.55,9.346) 87.977,9.773 ; R53.2@87.85,10.25 ccw(c88.695,10.25) 88.097,9.653 ; C18.1@89.013,6.737 ccw(c88.501,7.249) 89.225,7.249 ccw(c89.949,7.249) C18.1@89.437,6.737
NetD1_2: D1.2 R1.1 | length 10.8
  Top Layer w0.6: D1.2@38.45,15.55 38.786,15.55 R1.1@42.675,11.661 ; D1.2@38.775,14.7 cw(c38.775,12.623) 40.244,14.092 ; D1.2@39.625,15.55 ccw(c41.652,15.55) 40.219,14.117 ; 41.745,12.591 ccw(c42.875,13.721) R1.1@42.875,12.123 ; R1.1@42.228,12.108 cw(c41.78,11.66) R1.1@42.413,11.66
NetD2_4: D2.4 D3.4 D4.4 D6.4 R11.1 | length 146.4
  Top Layer w0.3: v2@59.412,27.587 61.787,27.587 62.375,28.175 v2(62.375,31.025) ; v2@59.702,27.448 cw(c60.037,27.113) 60.037,27.587 ; v2@59.702,27.802 ccw(c60.22,28.32) 60.22,27.587 ; v2@62.198,30.848 cw(c61.771,30.421) 62.375,30.421 cw(c62.979,30.421) v2@62.552,30.848
  Bottom Layer w0.3: 1.62,46.748 cw(c3.412,44.955) D2.4@3.412,47.49 ; 1.759,23.9 cw(c1.759,21.963) D3.4@3.129,23.333 ; 2.132,47.26 cw(c3.412,45.98) D2.4@3.412,47.79 ; 2.484,23.9 cw(c2.484,22.687) D3.4@3.341,23.545 ; 2.644,47.772 cw(c3.412,47.004) D2.4@3.412,48.09 ; D2.4@3.139,49.483 ccw(c2.55,50.112) 3.412,50.112 ; D3.4@3.412,23.615 3.128,23.9 1.275,23.9 0.9,24.275 0.9,46.028 D2.4@3.412,48.54 3.412,50.112 ; D2.4@3.685,49.483 cw(c4.274,50.112) 3.412,50.112 ; 58.439,48.569 cw(c58.439,47.592) D4.4@59.129,48.283 ; 58.454,48.569 ccw(c58.454,49.523) D4.4@59.129,48.848 ; D6.4@59.129,24.473 ccw(c58.174,25.429) 59.525,25.429 ; v2@59.348,27.448 cw(c58.921,27.021) 59.525,27.021 cw(c60.129,27.021) v2@59.702,27.448 ; v2@59.348,27.802 ccw(c58.921,28.229) 59.525,28.229 ccw(c60.129,28.229) v2@59.702,27.802 ; v2@59.412,27.587 59.525,27.7 59.525,38.725 60.2,39.4 62.825,39.4 63.8,40.375 63.8,45.075 62.775,46.1 61.025,46.1 59.412,47.713 D4.4@59.412,48.565 59.409,48.569 9.156,48.569 7.325,50.4 3.7,50.4 3.412,50.112 ; D4.4@59.412,47.515 cw(c59.412,47.039) D4.4@59.749,47.376 ; D4.4@59.512,47.915 ccw(c60.242,47.915) D4.4@59.726,47.399 ; D6.4@59.525,23.578 v2(59.525,27.625) ; 59.525,24.884 ccw(c60.105,24.884) D6.4@59.695,24.473 ; D4.4@59.812,47.915 ccw(c61.267,47.915) 60.238,46.887 ; R11.1@61.87,31.841 cw(c61.453,31.075) v2@62.325,31.075 ; v2@62.158,31.15 ccw(c61.74,31.391) 62.207,31.516 ; 62.192,31.57 ccw(c62.646,31.692) v2@62.469,31.257 ; v2@62.198,31.202 ccw(c61.892,31.508) 62.325,31.508 ; R11.1@62.325,31.749 ccw(c63.099,31.749) v2@62.552,31.202 ; R11.1@62.325,32.925 v2@62.325,31.075 ; v2(62.375,31.025) v2@62.325,31.075 ; R11.1@62.78,31.841 ccw(c63.197,31.075) v2@62.325,31.075
NetD2_5: D2.5 D3.5 D4.5 D6.5 R9.1 | length 186.1
  Bottom Layer w0.3: D3.5@4.742,22.683 cw(c4.059,22) 5.025,22 cw(c5.991,22) D3.5@5.308,22.683 ; D3.5@4.742,24.548 ccw(c4.059,25.231) 5.025,25.231 ccw(c5.991,25.231) D3.5@5.308,24.548 ; D2.5@4.742,47.608 cw(c4.059,46.925) 5.025,46.925 cw(c5.991,46.925) D2.5@5.308,47.608 ; D2.5@5.025,48.54 5.025,46.875 4.65,46.5 2.475,46.5 1.6,45.625 1.6,26.5 2.275,25.825 4.65,25.825 5.025,25.45 D3.5@5.025,23.615 5.025,21.975 4.5,21.45 1.676,21.45 0.75,20.524 0.75,2.501 2.126,1.126 2.426,0.825 54.049,0.825 54.174,0.95 54.974,1.751 55.15,1.926 55.15,9.525 58.025,12.4 58.025,21.05 58.425,21.45 60.75,21.45 61.025,21.725 D6.5@61.025,23.54 61.025,28.7 60.3,29.425 60.3,34.75 62.375,36.825 R9.1@62.375,37.05 62.375,37.3 64.4,39.325 64.4,45.325 63,46.725 62.05,46.725 61.025,47.75 D4.5@61.025,48.565 ; 60.711,35.161 cw(c62.375,33.496) R9.1@62.375,35.85 ; D6.5@60.742,22.608 cw(c60.059,21.925) 61.025,21.925 cw(c61.991,21.925) D6.5@61.308,22.608 ; D6.5@60.742,24.473 ccw(c60.059,25.156) 61.025,25.156 ccw(c61.991,25.156) D6.5@61.308,24.473 ; 60.771,35.221 ccw(c59.192,36.8) R9.1@61.425,36.8 ; D4.5@61.025,47.515 cw(c61.025,46.949) 61.425,47.35 ; 61.223,35.673 cw(c62.375,34.52) R9.1@62.375,36.15 ; R9.1@61.283,35.733 ccw(c60.216,36.8) R9.1@61.725,36.8 ; D4.5@61.425,47.915 ccw(c62.79,47.915) 61.825,46.95 ; R9.1@62.375,37.95 ccw(c62.375,39.519) 63.485,38.41 ccw(c64.594,37.3) R9.1@63.025,37.3 ; R9.1@62.375,38.25 ccw(c62.375,40.543) 63.997,38.922 ccw(c65.619,37.3) R9.1@63.325,37.3
NetD2_6: D2.6 D3.6 D4.6 D6.6 R3.1 | length 210.5
  Top Layer w0.3: v2(58.325,25.8) 58.45,25.925 v2(63.45,25.925) ; v2@58.502,25.623 cw(c59.23,24.895) 59.23,25.925 ; v2@63.273,25.748 ccw(c62.846,25.321) 62.846,25.925 ccw(c62.846,26.529) v2@63.273,26.102
  Bottom Layer w0.3: 2.25,37.819 ccw(c5.019,37.819) R3.1@3.061,35.861 ; 2.25,38.544 ccw(c5.744,38.544) R3.1@3.273,36.073 ; 2.25,39.268 ccw(c6.468,39.268) R3.1@3.485,36.285 ; 2.25,39.992 ccw(c7.192,39.992) R3.1@3.697,36.497 ; 2.25,40.716 ccw(c7.916,40.716) R3.1@3.91,36.71 ; 2.25,41.441 ccw(c8.641,41.441) R3.1@4.122,36.922 ; R3.1@2.522,36.451 ccw(c1.539,36.664) 2.25,37.375 ccw(c2.886,38.01) R3.1@3.16,37.155 ; R3.1@2.598,37.027 ccw(c3.054,37.484) R3.1@3.252,36.869 ; R3.1@2.778,35.078 cw(c1.156,33.456) 3.45,33.456 cw(c5.744,33.456) R3.1@4.122,35.078 ; R3.1@2.99,35.29 cw(c1.881,34.181) 3.45,34.181 cw(c5.019,34.181) R3.1@3.91,35.29 ; D3.6@6.355,22.683 cw(c5.672,22) 6.638,22 cw(c7.604,22) D3.6@6.921,22.683 ; D3.6@6.355,24.548 ccw(c5.672,25.231) 6.638,25.231 ccw(c7.604,25.231) D3.6@6.921,24.548 ; D2.6@6.355,47.608 cw(c5.672,46.925) 6.638,46.925 cw(c7.604,46.925) D2.6@6.921,47.608 ; D2.6@6.638,48.54 6.638,46.638 5.825,45.825 2.975,45.825 2.25,45.1 2.25,37.375 3.45,36.175 R3.1@3.45,36 3.45,28.425 6.638,25.237 D3.6@6.638,23.615 6.638,21.313 6.175,20.85 1.925,20.85 1.35,20.275 1.35,2.75 2.725,1.375 53.75,1.375 54.625,2.25 54.625,9.95 57.35,12.675 57.35,24.825 v2(58.325,25.8) ; v2@58.075,25.8 cw(c57.471,25.8) 57.898,25.373 cw(c58.325,24.946) v2@58.325,25.55 ; D6.6@62.377,24.493 ccw(c61.886,25.063) 62.638,25.063 ; D6.6@62.638,23.54 62.638,25.063 ; D4.6@62.638,48.565 64.085,48.565 65.1,47.55 65.1,27.525 62.638,25.063 ; D6.6@62.899,24.493 cw(c63.389,25.063) 62.638,25.063 ; D4.6@62.921,48.283 cw(c63.604,47.6) 63.604,48.565 cw(c63.604,49.531) D4.6@62.921,48.848 ; 62.988,25.413 ccw(c62.476,25.925) v2@63.2,25.925 ; 63.109,25.534 cw(c63.45,25.192) v2@63.45,25.675 ; v2@63.45,26.175 ccw(c63.45,26.899) 63.962,26.387 ; v2@63.7,25.925 cw(c64.183,25.925) 63.841,26.266